# EAGLE board XuLA-SEP_array (EAGLE 5.10), part 1 of 6
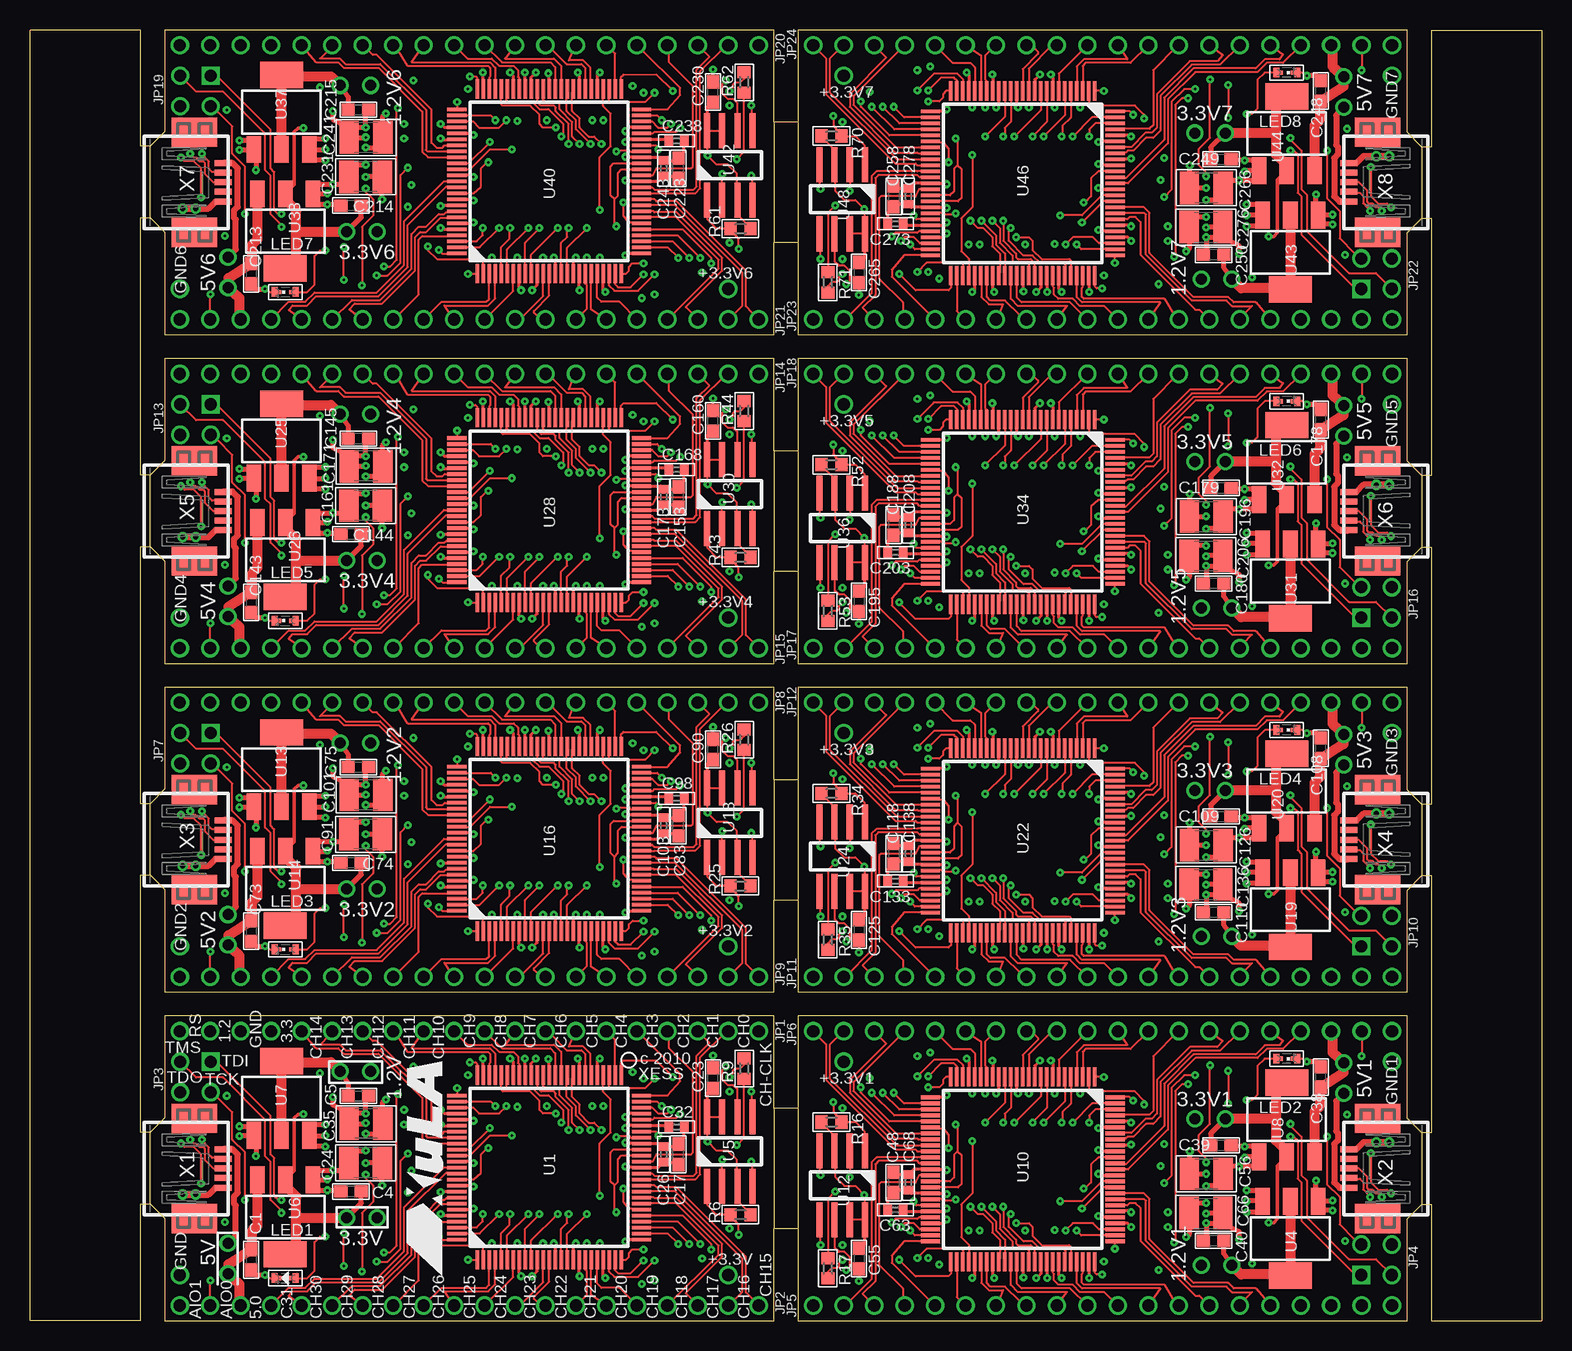
[diagram p0: board, top side]
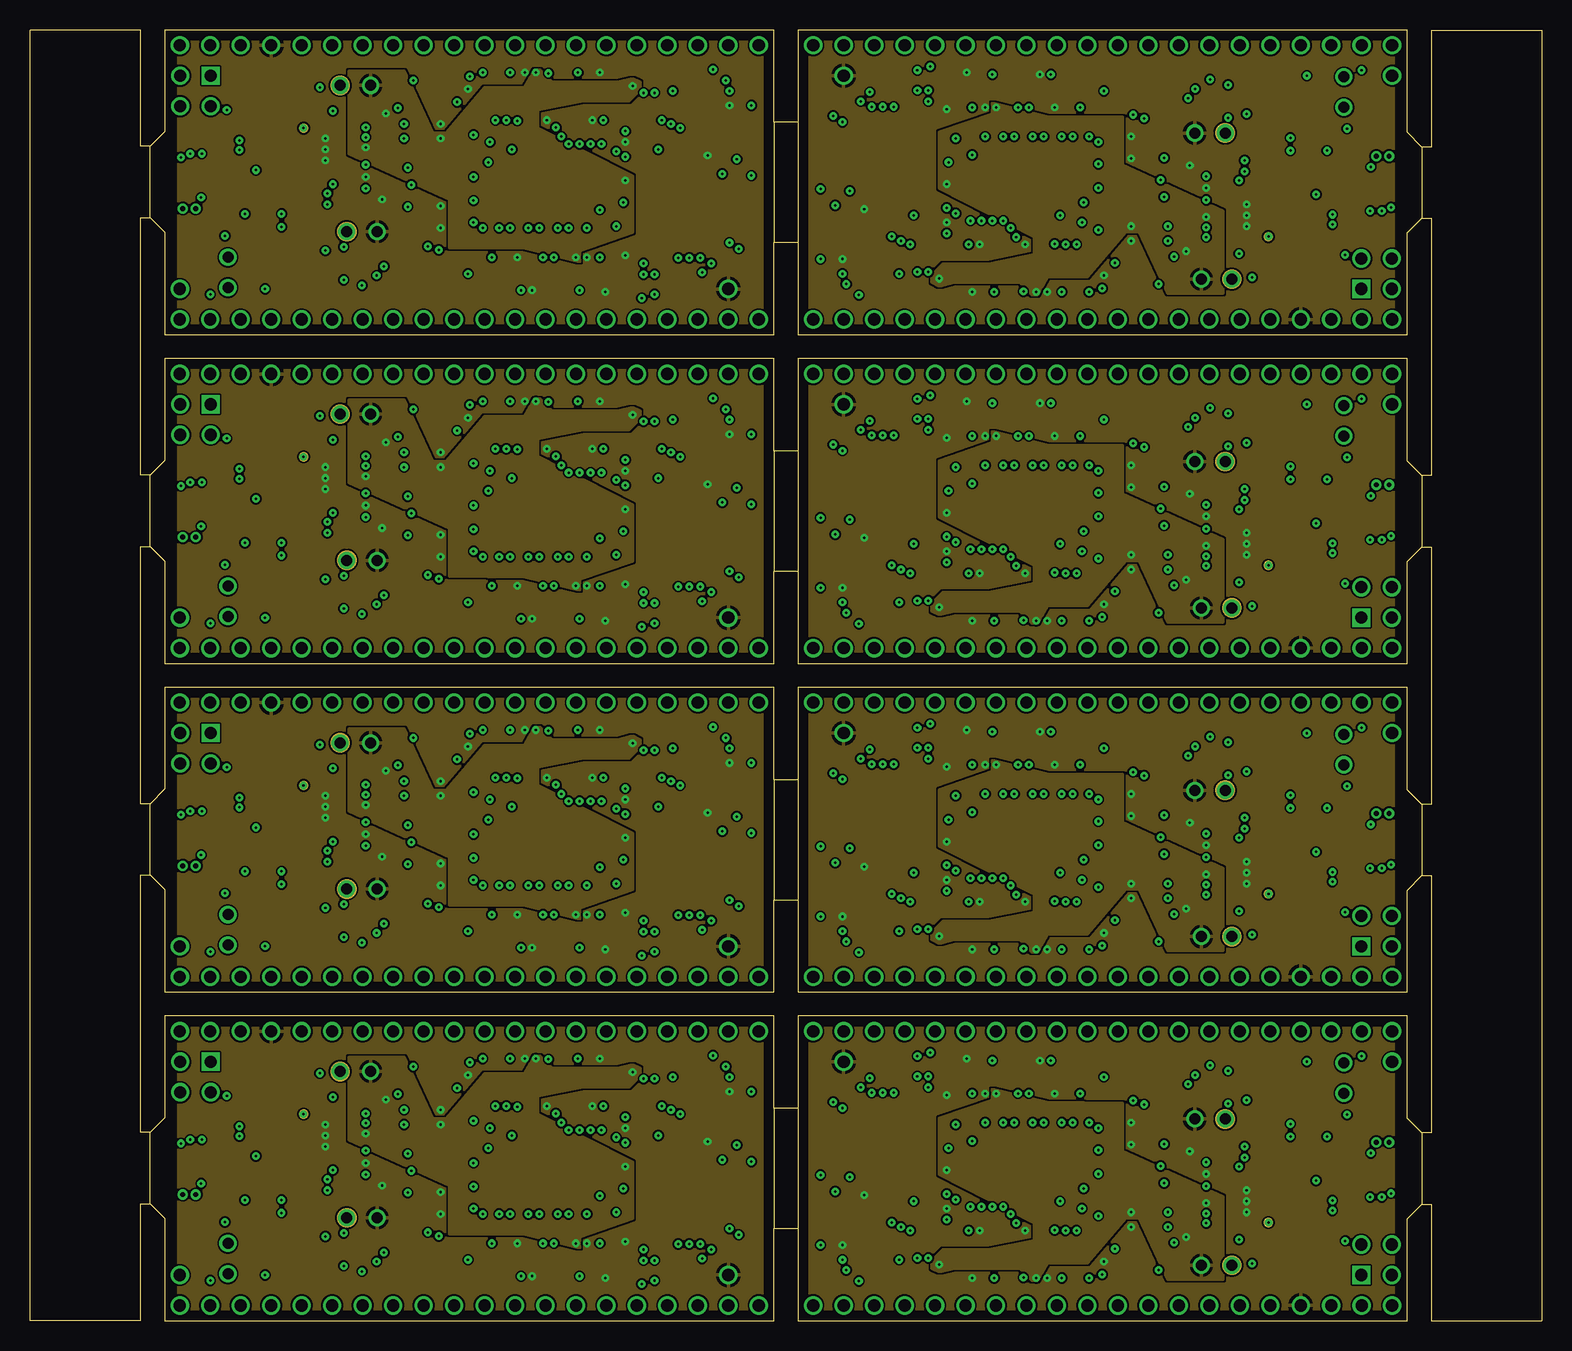
[diagram p1: board, inner layer Route3]
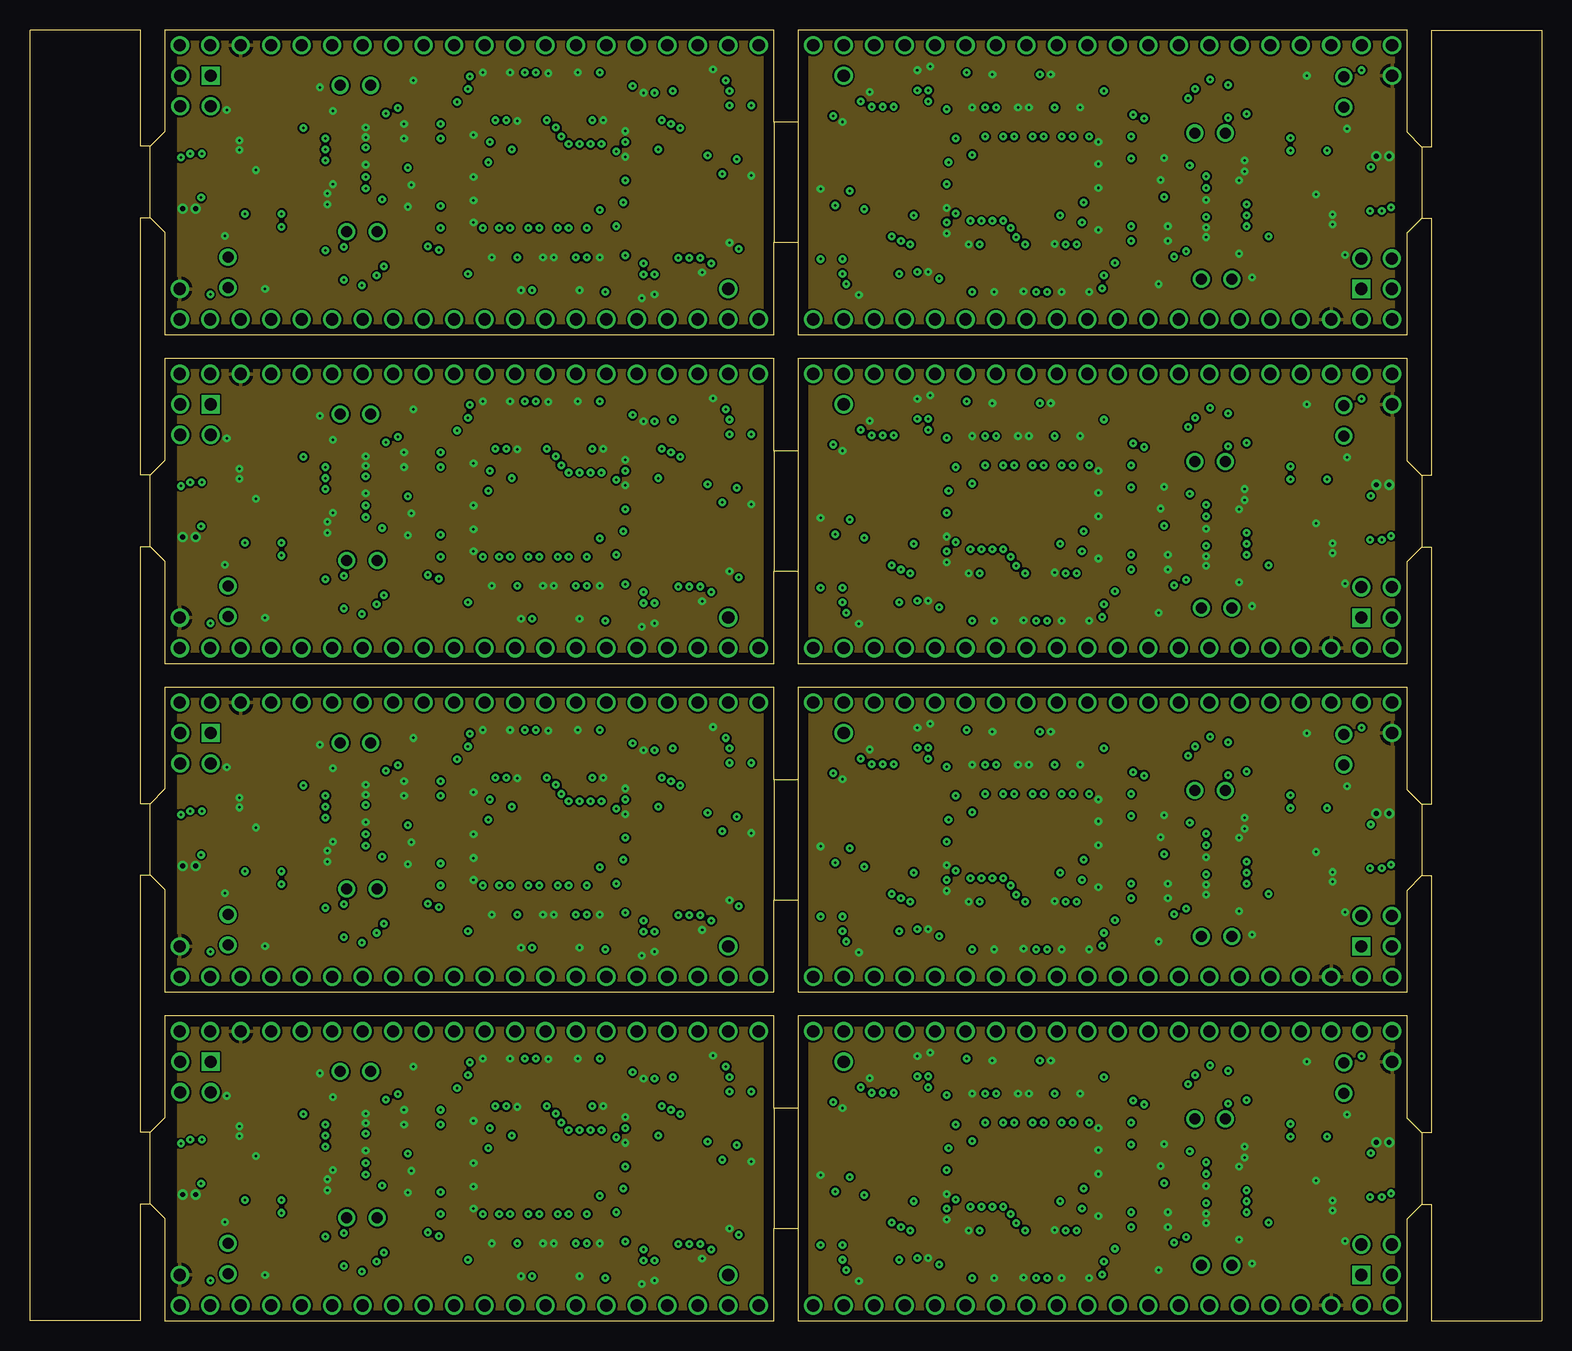
[diagram p2: board, inner layer Route4]
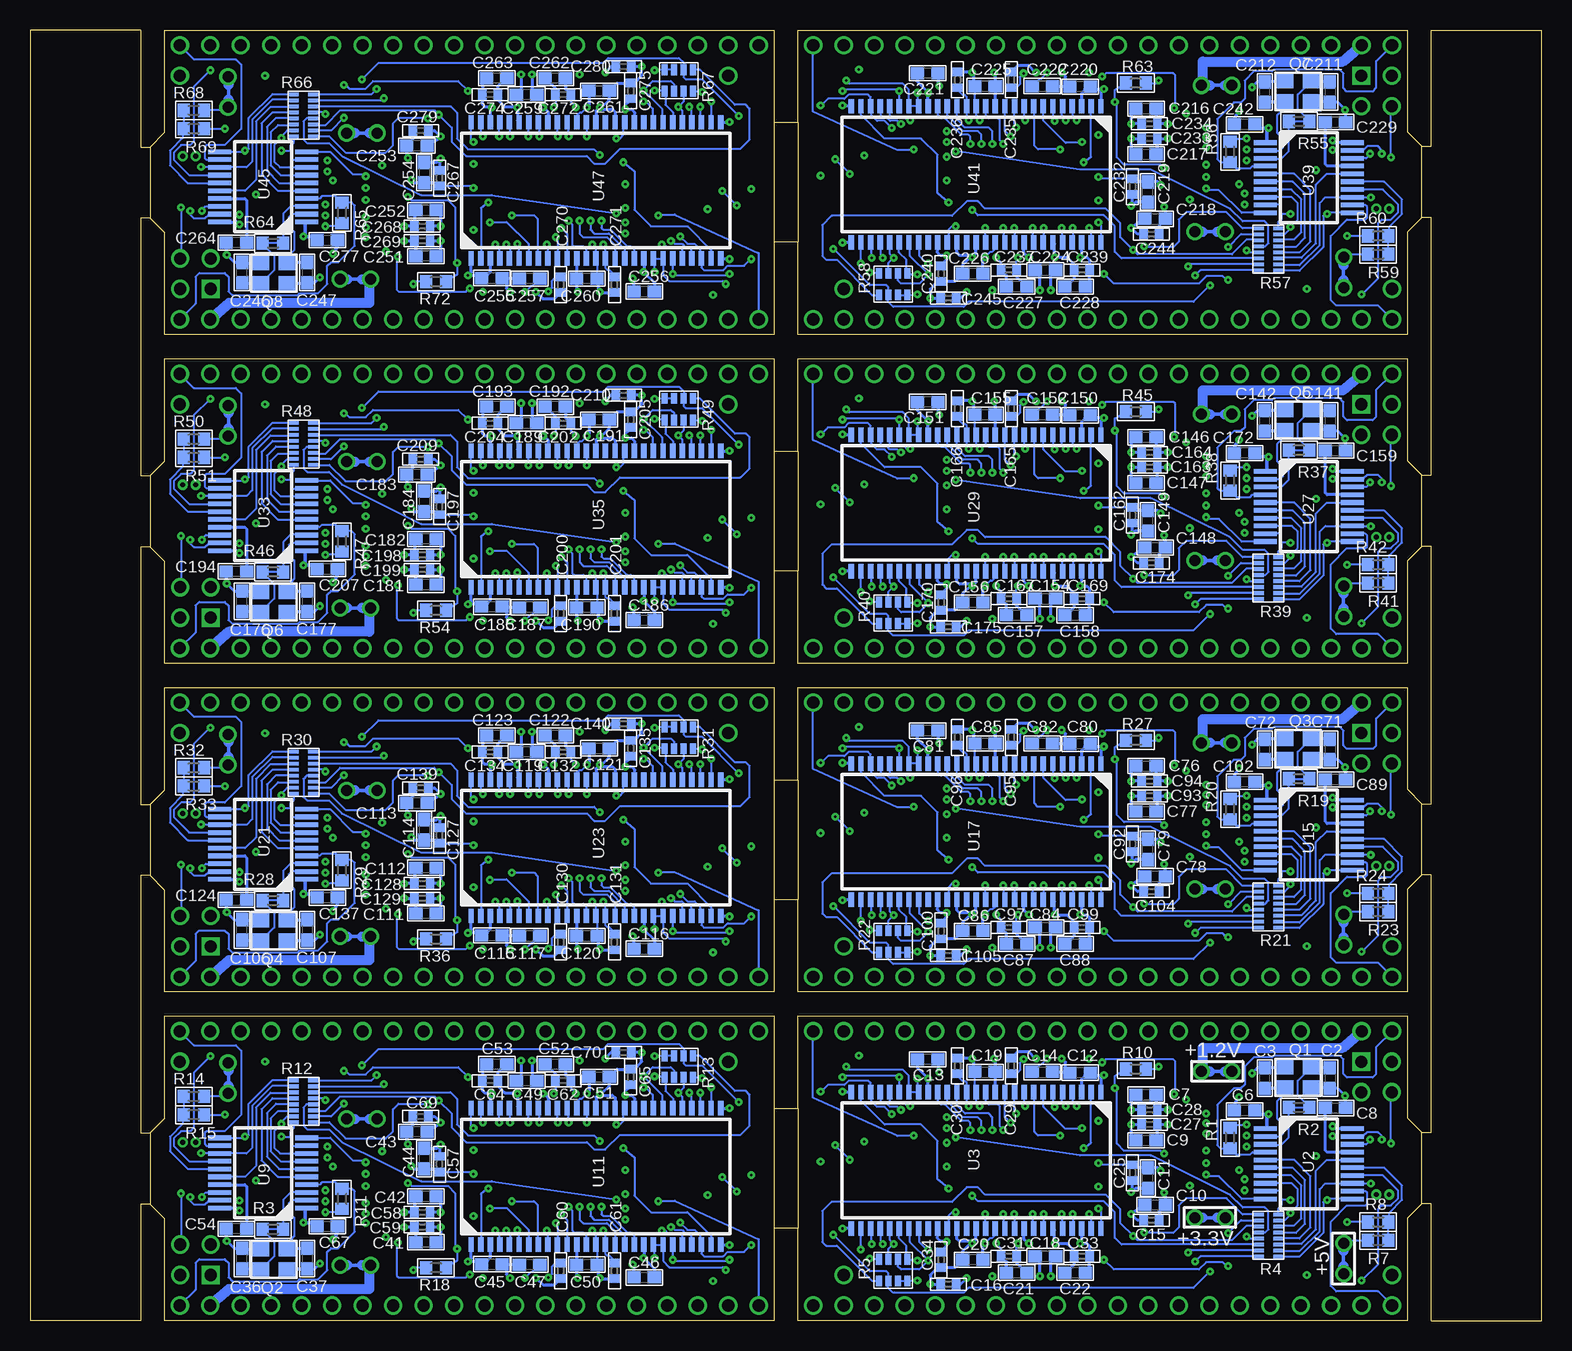
[diagram p3: board, bottom side, seen from below]

Size 126.04 x 107.6 mm. Coordinates in mm from the lower left corner, seen from the top.
Outline: 124 segments
Copper layers (1+3*4+16): Top 0.035mm / dielectric 0.3048mm / Route3 0.07mm / dielectric 0.3048mm / Route4 0.07mm / dielectric 0.3048mm / Bottom 0.035mm
Design rules "logic_popper": minimum track width 6mil, minimum drill 8mil, track to track 6mil, track to pad 6mil, pad to pad 6mil, via to via 6mil, smd to smd 6mil, copper to edge 20mil, drill to drill 8mil, minimum pad ring 10mil, minimum via ring 8.5mil, stop-mask expansion 4mil, vias tented up to drill 20mil, thermal gap 10mil
Net classes: 1 power: clearance 0.254 mm

## Footprints (pad centres in the part's own frame; a part is rotated, then mirrored left to right if it is on the bottom)
JP1-NOSILK = drill 0.914 round: 1 0,-1.27; 2 0,1.27
TP-MINI = drill 1.016 round: 1 0,0
C0603 = smd 1.1 x 1: 1 -0.85,0; 2 0.85,0
C0402 = smd 0.7 x 0.9: 1 -0.65,0; 2 0.65,0
C1210 = smd 1.6 x 2.7: 1 -1.4,0; 2 1.4,0
1X20-NOSILK = drill 1.016 round: 1 -24.13,0; 2 -21.59,0; 3 -19.05,0; 4 -16.51,0; 5 -13.97,0; 6 -11.43,0; 7 -8.89,0; 8 -6.35,0; 9 -3.81,0; 10 -1.27,0; 11 1.27,0; 12 3.81,0; 13 6.35,0; 14 8.89,0; 15 11.43,0; 16 13.97,0; 17 16.51,0; 18 19.05,0; 19 21.59,0; 20 24.13,0
2X02-NOSILK = drill 1.016 square: 1 -1.27,-1.27 | drill 1.016 round: 2 -1.27,1.27; 3 1.27,-1.27; 4 1.27,1.27
CHIPLED-0603-TTW = smd 0.8 x 0.5: A 0,-0.875; C 0,0.875 | smd 0.35 x 0.35: A@1 0,-0.5; C@1 0,0.5
32X25 = smd 1.2 x 1.4: 1 0,0; 2 0,-2.2; 3 1.7,-2.2; 4 1.7,0
R0603 = smd 1 x 1.1: 1 -0.85,0; 2 0.85,0
741X163 = smd 0.3 x 0.8: 1 -1.75,-0.8; 2 -1.25,-0.8; 3 -0.75,-0.8; 4 -0.25,-0.8; 5 0.25,-0.8; 6 0.75,-0.8; 7 1.25,-0.8; 8 1.75,-0.8; 9 1.75,0.8; 10 1.25,0.8; 11 0.75,0.8; 12 0.25,0.8; 13 -0.25,0.8; 14 -0.75,0.8; 15 -1.25,0.8; 16 -1.75,0.8
742C083 = smd 0.5 x 0.9: 1 -0.4,-0.9; 2 0.4,-0.9; 3 1.2,-0.9; 4 2,-0.9; 5 2,0.9; 6 1.2,0.9; 7 0.4,0.9; 8 -0.4,0.9
XILINX-VQ100 = smd 1.6 x 0.3: 1 0,0; 2 0,-0.5; 3 0,-1; 4 0,-1.5; 5 0,-2; 6 0,-2.5; 7 0,-3; 8 0,-3.5; 9 0,-4; 10 0,-4.5; 11 0,-5; 12 0,-5.5; 13 0,-6; 14 0,-6.5; 15 0,-7; 16 0,-7.5; 17 0,-8; 18 0,-8.5; 19 0,-9; 20 0,-9.5; 21 0,-10; 22 0,-10.5; 23 0,-11; 24 0,-11.5; 25 0,-12; 51 15.4,-12; 52 15.4,-11.5; 53 15.4,-11; 54 15.4,-10.5; 55 15.4,-10; 56 15.4,-9.5; 57 15.4,-9; 58 15.4,-8.5; 59 15.4,-8; 60 15.4,-7.5; 61 15.4,-7; 62 15.4,-6.5; 63 15.4,-6; 64 15.4,-5.5; 65 15.4,-5; 66 15.4,-4.5; 67 15.4,-4; 68 15.4,-3.5; 69 15.4,-3; 70 15.4,-2.5; 71 15.4,-2; 72 15.4,-1.5; 73 15.4,-1; 74 15.4,-0.5; 75 15.4,0 | smd 0.3 x 1.6: 26 1.7,-13.7; 27 2.2,-13.7; 28 2.7,-13.7; 29 3.2,-13.7; 30 3.7,-13.7; 31 4.2,-13.7; 32 4.7,-13.7; 33 5.2,-13.7; 34 5.7,-13.7; 35 6.2,-13.7; 36 6.7,-13.7; 37 7.2,-13.7; 38 7.7,-13.7; 39 8.2,-13.7; 40 8.7,-13.7; 41 9.2,-13.7; 42 9.7,-13.7; 43 10.2,-13.7; 44 10.7,-13.7; 45 11.2,-13.7; 46 11.7,-13.7; 47 12.2,-13.7; 48 12.7,-13.7; 49 13.2,-13.7; 50 13.7,-13.7; 76 13.7,1.7; 77 13.2,1.7; 78 12.7,1.7; 79 12.2,1.7; 80 11.7,1.7; 81 11.2,1.7; 82 10.7,1.7; 83 10.2,1.7; 84 9.7,1.7; 85 9.2,1.7; 86 8.7,1.7; 87 8.2,1.7; 88 7.7,1.7; 89 7.2,1.7; 90 6.7,1.7; 91 6.2,1.7; 92 5.7,1.7; 93 5.2,1.7; 94 4.7,1.7; 95 4.2,1.7; 96 3.7,1.7; 97 3.2,1.7; 98 2.7,1.7; 99 2.2,1.7; 100 1.7,1.7
MICROCHIP-20_SSOP = smd 1.89 x 0.38: 1 0,0; 2 0,-0.65; 3 0,-1.3; 4 0,-1.95; 5 0,-2.6; 6 0,-3.25; 7 0,-3.9; 8 0,-4.55; 9 0,-5.2; 10 0,-5.85; 11 7.25,-5.85; 12 7.25,-5.2; 13 7.25,-4.55; 14 7.25,-3.9; 15 7.25,-3.25; 16 7.25,-2.6; 17 7.25,-1.95; 18 7.25,-1.3; 19 7.25,-0.65; 20 7.25,0
TSOPII-54 = smd 1.2 x 0.45: 1 0,0; 2 0,-0.8; 3 0,-1.6; 4 0,-2.4; 5 0,-3.2; 6 0,-4; 7 0,-4.8; 8 0,-5.6; 9 0,-6.4; 10 0,-7.2; 11 0,-8; 12 0,-8.8; 13 0,-9.6; 14 0,-10.4; 15 0,-11.2; 16 0,-12; 17 0,-12.8; 18 0,-13.6; 19 0,-14.4; 20 0,-15.2; 21 0,-16; 22 0,-16.8; 23 0,-17.6; 24 0,-18.4; 25 0,-19.2; 26 0,-20; 27 0,-20.8; 28 11.36,-20.8; 29 11.36,-20; 30 11.36,-19.2; 31 11.36,-18.4; 32 11.36,-17.6; 33 11.36,-16.8; 34 11.36,-16; 35 11.36,-15.2; 36 11.36,-14.4; 37 11.36,-13.6; 38 11.36,-12.8; 39 11.36,-12; 40 11.36,-11.2; 41 11.36,-10.4; 42 11.36,-9.6; 43 11.36,-8.8; 44 11.36,-8; 45 11.36,-7.2; 46 11.36,-6.4; 47 11.36,-5.6; 48 11.36,-4.8; 49 11.36,-4; 50 11.36,-3.2; 51 11.36,-2.4; 52 11.36,-1.6; 53 11.36,-0.8; 54 11.36,0
SOT223 = smd 1.219 x 2.235: 1 -2.311,-3.099; 2 0,-3.099; 3 2.311,-3.099 | smd 3.6 x 2.2: 4 0,3.099
WINBOND-8_SOIC_150_208 = smd 2.921 x 0.51: 1 1.06,0; 2 1.06,-1.27; 3 1.06,-2.54; 4 1.06,-3.81; 5 6.839,-3.81; 6 6.839,-2.54; 7 6.839,-1.27; 8 6.839,0
UX60SC-MB-5ST = smd 1.4 x 0.5: 1 6.1,1.6; 2 6.1,0.8; 3 6.1,0; 4 6.1,-0.8; 5 6.1,-1.6 | smd 3.8 x 2.449: M1 3.7,-4.175; M2 3.7,4.175

## Placement (x,y rotation side)
1.2V  [JP1-NOSILK]  27.12,20.78 270 top
1.2V1  [JP1-NOSILK]  98.92,4.62 90 top
1.2V2  [JP1-NOSILK]  27.12,48.18 270 top
1.2V3  [JP1-NOSILK]  98.92,32.02 90 top
1.2V4  [JP1-NOSILK]  27.12,75.58 270 top
1.2V5  [JP1-NOSILK]  98.92,59.42 90 top
1.2V6  [JP1-NOSILK]  27.12,102.98 270 top
1.2V7  [JP1-NOSILK]  98.92,86.82 90 top
3.3V  [JP1-NOSILK]  27.68,8.59 270 top
3.3V1  [JP1-NOSILK]  98.36,16.81 90 top
3.3V2  [JP1-NOSILK]  27.68,35.99 270 top
3.3V3  [JP1-NOSILK]  98.36,44.21 90 top
3.3V4  [JP1-NOSILK]  27.68,63.39 270 top
3.3V5  [JP1-NOSILK]  98.36,71.61 90 top
3.3V6  [JP1-NOSILK]  27.68,90.79 270 top
3.3V7  [JP1-NOSILK]  98.36,99.01 90 top
5V  [JP1-NOSILK]  16.5,5.18 180 top
5V1  [JP1-NOSILK]  109.54,20.22 0 top
5V2  [JP1-NOSILK]  16.5,32.58 180 top
5V3  [JP1-NOSILK]  109.54,47.62 0 top
5V4  [JP1-NOSILK]  16.5,59.98 180 top
5V5  [JP1-NOSILK]  109.54,75.02 0 top
5V6  [JP1-NOSILK]  16.5,87.38 180 top
5V7  [JP1-NOSILK]  109.54,102.42 0 top
+3.3V  TPTP-MINI  [TP-MINI]  58.21,3.81 0 top
+3.3V1  TPTP-MINI  [TP-MINI]  67.83,21.59 180 top
+3.3V2  TPTP-MINI  [TP-MINI]  58.21,31.21 0 top
+3.3V3  TPTP-MINI  [TP-MINI]  67.83,48.99 180 top
+3.3V4  TPTP-MINI  [TP-MINI]  58.21,58.61 0 top
+3.3V5  TPTP-MINI  [TP-MINI]  67.83,76.39 180 top
+3.3V6  TPTP-MINI  [TP-MINI]  58.21,86.01 0 top
+3.3V7  TPTP-MINI  [TP-MINI]  67.83,103.79 180 top
C1  4.7uF  [C0603]  18.43,5.08 270 top
C2  10pF  [C0603]  17.67,20.22 270 bottom
C3  10pF  [C0603]  23.11,20.22 90 bottom
C4  4.7uF  [C0603]  26.76,10.77 180 top
C5  4.7uF  [C0603]  27.37,18.75 0 top
C6  0.1uF  [C0603]  24.78,17.53 180 bottom
C7  0.1uF  [C0603]  33.01,18.85 0 bottom
C8  0.47uF  [C0603]  17.21,17.73 0 bottom
C9  0.1uF  [C0603]  33.01,15.04 0 bottom
C10  0.1uF  [C0603]  32.25,9.65 0 bottom
C11  0.1uF  [C0603]  32.86,11.89 90 bottom
C12  0.1uF  [C0603]  38.5,20.68 180 bottom
C13  0.1uF  [C0603]  51.2,21.79 180 bottom
C14  0.1uF  [C0603]  41.65,20.73 0 bottom
C15  10nF  [C0402]  32.56,8.38 0 bottom
C16  10nF  [C0402]  49.47,3.05 180 bottom
C17  0.1uF  [C0603]  54.04,13.87 90 top
C18  0.1uF  [C0603]  41.39,5.38 0 bottom
C19  0.1uF  [C0603]  46.42,20.73 0 bottom
C20  0.1uF  [C0603]  47.44,5.08 180 bottom
C21  0.1uF  [C0603]  43.78,4.01 0 bottom
C22  0.1uF  [C0603]  38.91,4.01 0 bottom
C23  0.1uF  [C0603]  56.94,20.22 90 top
C24  22uF  [C1210]  27.98,13.16 180 top
C25  10nF  [C0402]  34.13,12.34 90 bottom
C26  10nF  [C0402]  52.82,13.87 90 top
C27  10nF  [C0402]  32.71,16.36 0 bottom
C28  10nF  [C0402]  32.71,17.58 0 bottom
C29  10nF  [C0402]  44.24,21.23 270 bottom
C30  10nF  [C0402]  48.71,21.23 270 bottom
C31  10nF  [C0402]  44.44,5.38 0 bottom
C32  10nF  [C0402]  53.89,16.15 0 top
C33  10nF  [C0402]  38.35,5.38 0 bottom
C34  10nF  [C0402]  50.08,5.08 270 bottom
C35  22uF  [C1210]  28.01,16.43 180 top
C36  10pF  [C0603]  108.37,5.18 90 bottom
C37  10pF  [C0603]  102.93,5.18 270 bottom
C38  4.7uF  [C0603]  107.61,20.32 90 top
C39  4.7uF  [C0603]  99.27,14.63 0 top
C40  4.7uF  [C0603]  98.66,6.65 180 top
C41  0.1uF  [C0603]  93.03,6.55 180 bottom
C42  0.1uF  [C0603]  93.03,10.36 180 bottom
C43  0.1uF  [C0603]  93.79,15.75 180 bottom
C44  0.1uF  [C0603]  93.18,13.51 270 bottom
C45  0.1uF  [C0603]  87.54,4.72 0 bottom
C46  0.1uF  [C0603]  74.84,3.61 0 bottom
C47  0.1uF  [C0603]  84.39,4.67 180 bottom
C48  0.1uF  [C0603]  71.99,11.53 270 top
C49  0.1uF  [C0603]  84.64,20.02 180 bottom
C50  0.1uF  [C0603]  79.61,4.67 180 bottom
C51  0.1uF  [C0603]  78.6,20.32 0 bottom
C52  0.1uF  [C0603]  82.26,21.39 180 bottom
C53  0.1uF  [C0603]  87.13,21.39 180 bottom
C54  0.47uF  [C0603]  108.82,7.67 180 bottom
C55  0.1uF  [C0603]  69.1,5.18 270 top
C56  22uF  [C1210]  98.06,12.24 0 top
C57  10nF  [C0402]  91.91,13.06 270 bottom
C58  10nF  [C0402]  93.33,9.04 180 bottom
C59  10nF  [C0402]  93.33,7.82 180 bottom
C60  10nF  [C0402]  81.8,4.17 90 bottom
C61  10nF  [C0402]  77.33,4.17 90 bottom
C62  10nF  [C0402]  81.6,20.02 180 bottom
C63  10nF  [C0402]  72.15,9.25 180 top
C64  10nF  [C0402]  87.69,20.02 180 bottom
C65  10nF  [C0402]  75.96,20.32 90 bottom
C66  22uF  [C1210]  98.03,8.97 0 top
C67  0.1uF  [C0603]  101.26,7.87 0 bottom
C68  10nF  [C0402]  73.21,11.53 270 top
C69  10nF  [C0402]  93.48,17.02 180 bottom
C70  10nF  [C0402]  76.57,22.35 0 bottom
C71  10pF  [C0603]  17.67,47.62 270 bottom
C72  10pF  [C0603]  23.11,47.62 90 bottom
C73  4.7uF  [C0603]  18.43,32.48 270 top
C74  4.7uF  [C0603]  26.76,38.17 180 top
C75  4.7uF  [C0603]  27.37,46.15 0 top
C76  0.1uF  [C0603]  33.01,46.25 0 bottom
C77  0.1uF  [C0603]  33.01,42.44 0 bottom
C78  0.1uF  [C0603]  32.25,37.05 0 bottom
C79  0.1uF  [C0603]  32.86,39.29 90 bottom
C80  0.1uF  [C0603]  38.5,48.08 180 bottom
C81  0.1uF  [C0603]  51.2,49.19 180 bottom
C82  0.1uF  [C0603]  41.65,48.13 0 bottom
C83  0.1uF  [C0603]  54.04,41.27 90 top
C84  0.1uF  [C0603]  41.39,32.78 0 bottom
C85  0.1uF  [C0603]  46.42,48.13 0 bottom
C86  0.1uF  [C0603]  47.44,32.48 180 bottom
C87  0.1uF  [C0603]  43.78,31.41 0 bottom
C88  0.1uF  [C0603]  38.91,31.41 0 bottom
C89  0.47uF  [C0603]  17.21,45.13 0 bottom
C90  0.1uF  [C0603]  56.94,47.62 90 top
C91  22uF  [C1210]  27.98,40.56 180 top
C92  10nF  [C0402]  34.13,39.74 90 bottom
C93  10nF  [C0402]  32.71,43.76 0 bottom
C94  10nF  [C0402]  32.71,44.98 0 bottom
C95  10nF  [C0402]  44.24,48.63 270 bottom
C96  10nF  [C0402]  48.71,48.63 270 bottom
C97  10nF  [C0402]  44.44,32.78 0 bottom
C98  10nF  [C0402]  53.89,43.55 0 top
C99  10nF  [C0402]  38.35,32.78 0 bottom
C100  10nF  [C0402]  50.08,32.48 270 bottom
C101  22uF  [C1210]  28.01,43.83 180 top
C102  0.1uF  [C0603]  24.78,44.93 180 bottom
C103  10nF  [C0402]  52.82,41.27 90 top
C104  10nF  [C0402]  32.56,35.78 0 bottom
C105  10nF  [C0402]  49.47,30.45 180 bottom
C106  10pF  [C0603]  108.37,32.58 90 bottom
C107  10pF  [C0603]  102.93,32.58 270 bottom
C108  4.7uF  [C0603]  107.61,47.72 90 top
C109  4.7uF  [C0603]  99.27,42.03 0 top
C110  4.7uF  [C0603]  98.66,34.05 180 top
C111  0.1uF  [C0603]  93.03,33.95 180 bottom
C112  0.1uF  [C0603]  93.03,37.76 180 bottom
C113  0.1uF  [C0603]  93.79,43.15 180 bottom
C114  0.1uF  [C0603]  93.18,40.91 270 bottom
C115  0.1uF  [C0603]  87.54,32.12 0 bottom
C116  0.1uF  [C0603]  74.84,31.01 0 bottom
C117  0.1uF  [C0603]  84.39,32.07 180 bottom
C118  0.1uF  [C0603]  71.99,38.93 270 top
C119  0.1uF  [C0603]  84.64,47.42 180 bottom
C120  0.1uF  [C0603]  79.61,32.07 180 bottom
C121  0.1uF  [C0603]  78.6,47.72 0 bottom
C122  0.1uF  [C0603]  82.26,48.79 180 bottom
C123  0.1uF  [C0603]  87.13,48.79 180 bottom
C124  0.47uF  [C0603]  108.82,35.07 180 bottom
C125  0.1uF  [C0603]  69.1,32.58 270 top
C126  22uF  [C1210]  98.06,39.64 0 top
C127  10nF  [C0402]  91.91,40.46 270 bottom
C128  10nF  [C0402]  93.33,36.44 180 bottom
C129  10nF  [C0402]  93.33,35.22 180 bottom
C130  10nF  [C0402]  81.8,31.57 90 bottom
C131  10nF  [C0402]  77.33,31.57 90 bottom
C132  10nF  [C0402]  81.6,47.42 180 bottom
C133  10nF  [C0402]  72.15,36.65 180 top
C134  10nF  [C0402]  87.69,47.42 180 bottom
C135  10nF  [C0402]  75.96,47.72 90 bottom
C136  22uF  [C1210]  98.03,36.37 0 top
C137  0.1uF  [C0603]  101.26,35.27 0 bottom
C138  10nF  [C0402]  73.21,38.93 270 top
C139  10nF  [C0402]  93.48,44.42 180 bottom
C140  10nF  [C0402]  76.57,49.75 0 bottom
C141  10pF  [C0603]  17.67,75.02 270 bottom
C142  10pF  [C0603]  23.11,75.02 90 bottom
C143  4.7uF  [C0603]  18.43,59.88 270 top
C144  4.7uF  [C0603]  26.76,65.57 180 top
C145  4.7uF  [C0603]  27.37,73.55 0 top
C146  0.1uF  [C0603]  33.01,73.65 0 bottom
C147  0.1uF  [C0603]  33.01,69.84 0 bottom
C148  0.1uF  [C0603]  32.25,64.45 0 bottom
C149  0.1uF  [C0603]  32.86,66.69 90 bottom
C150  0.1uF  [C0603]  38.5,75.48 180 bottom
C151  0.1uF  [C0603]  51.2,76.59 180 bottom
C152  0.1uF  [C0603]  41.65,75.53 0 bottom
C153  0.1uF  [C0603]  54.04,68.67 90 top
C154  0.1uF  [C0603]  41.39,60.18 0 bottom
C155  0.1uF  [C0603]  46.42,75.53 0 bottom
C156  0.1uF  [C0603]  47.44,59.88 180 bottom
C157  0.1uF  [C0603]  43.78,58.81 0 bottom
C158  0.1uF  [C0603]  38.91,58.81 0 bottom
C159  0.47uF  [C0603]  17.21,72.53 0 bottom
C160  0.1uF  [C0603]  56.94,75.02 90 top
C161  22uF  [C1210]  27.98,67.96 180 top
C162  10nF  [C0402]  34.13,67.14 90 bottom
C163  10nF  [C0402]  32.71,71.16 0 bottom
C164  10nF  [C0402]  32.71,72.38 0 bottom
C165  10nF  [C0402]  44.24,76.03 270 bottom
C166  10nF  [C0402]  48.71,76.03 270 bottom
C167  10nF  [C0402]  44.44,60.18 0 bottom
C168  10nF  [C0402]  53.89,70.95 0 top
C169  10nF  [C0402]  38.35,60.18 0 bottom
C170  10nF  [C0402]  50.08,59.88 270 bottom
C171  22uF  [C1210]  28.01,71.23 180 top
C172  0.1uF  [C0603]  24.78,72.33 180 bottom
C173  10nF  [C0402]  52.82,68.67 90 top
C174  10nF  [C0402]  32.56,63.18 0 bottom
C175  10nF  [C0402]  49.47,57.85 180 bottom
C176  10pF  [C0603]  108.37,59.98 90 bottom
C177  10pF  [C0603]  102.93,59.98 270 bottom
C178  4.7uF  [C0603]  107.61,75.12 90 top
C179  4.7uF  [C0603]  99.27,69.43 0 top
C180  4.7uF  [C0603]  98.66,61.45 180 top
C181  0.1uF  [C0603]  93.03,61.35 180 bottom
C182  0.1uF  [C0603]  93.03,65.16 180 bottom
C183  0.1uF  [C0603]  93.79,70.55 180 bottom
C184  0.1uF  [C0603]  93.18,68.31 270 bottom
C185  0.1uF  [C0603]  87.54,59.52 0 bottom
C186  0.1uF  [C0603]  74.84,58.41 0 bottom
C187  0.1uF  [C0603]  84.39,59.47 180 bottom
C188  0.1uF  [C0603]  71.99,66.33 270 top
C189  0.1uF  [C0603]  84.64,74.82 180 bottom
C190  0.1uF  [C0603]  79.61,59.47 180 bottom
C191  0.1uF  [C0603]  78.6,75.12 0 bottom
C192  0.1uF  [C0603]  82.26,76.19 180 bottom
C193  0.1uF  [C0603]  87.13,76.19 180 bottom
C194  0.47uF  [C0603]  108.82,62.47 180 bottom
C195  0.1uF  [C0603]  69.1,59.98 270 top
C196  22uF  [C1210]  98.06,67.04 0 top
C197  10nF  [C0402]  91.91,67.86 270 bottom
C198  10nF  [C0402]  93.33,63.84 180 bottom
C199  10nF  [C0402]  93.33,62.62 180 bottom
C200  10nF  [C0402]  81.8,58.97 90 bottom
C201  10nF  [C0402]  77.33,58.97 90 bottom
C202  10nF  [C0402]  81.6,74.82 180 bottom
C203  10nF  [C0402]  72.15,64.05 180 top
C204  10nF  [C0402]  87.69,74.82 180 bottom
C205  10nF  [C0402]  75.96,75.12 90 bottom
C206  22uF  [C1210]  98.03,63.77 0 top
C207  0.1uF  [C0603]  101.26,62.67 0 bottom
C208  10nF  [C0402]  73.21,66.33 270 top
C209  10nF  [C0402]  93.48,71.82 180 bottom
C210  10nF  [C0402]  76.57,77.15 0 bottom
C211  10pF  [C0603]  17.67,102.42 270 bottom
C212  10pF  [C0603]  23.11,102.42 90 bottom
C213  4.7uF  [C0603]  18.43,87.28 270 top
C214  4.7uF  [C0603]  26.76,92.97 180 top
C215  4.7uF  [C0603]  27.37,100.95 0 top
C216  0.1uF  [C0603]  33.01,101.05 0 bottom
C217  0.1uF  [C0603]  33.01,97.24 0 bottom
C218  0.1uF  [C0603]  32.25,91.85 0 bottom
C219  0.1uF  [C0603]  32.86,94.09 90 bottom
C220  0.1uF  [C0603]  38.5,102.88 180 bottom
C221  0.1uF  [C0603]  51.2,103.99 180 bottom
C222  0.1uF  [C0603]  41.65,102.93 0 bottom
C223  0.1uF  [C0603]  54.04,96.07 90 top
C224  0.1uF  [C0603]  41.39,87.58 0 bottom
C225  0.1uF  [C0603]  46.42,102.93 0 bottom
C226  0.1uF  [C0603]  47.44,87.28 180 bottom
C227  0.1uF  [C0603]  43.78,86.21 0 bottom
C228  0.1uF  [C0603]  38.91,86.21 0 bottom
C229  0.47uF  [C0603]  17.21,99.93 0 bottom
C230  0.1uF  [C0603]  56.94,102.42 90 top
C231  22uF  [C1210]  27.98,95.36 180 top
C232  10nF  [C0402]  34.13,94.54 90 bottom
C233  10nF  [C0402]  32.71,98.56 0 bottom
C234  10nF  [C0402]  32.71,99.78 0 bottom
C235  10nF  [C0402]  44.24,103.43 270 bottom
C236  10nF  [C0402]  48.71,103.43 270 bottom
C237  10nF  [C0402]  44.44,87.58 0 bottom
C238  10nF  [C0402]  53.89,98.35 0 top
C239  10nF  [C0402]  38.35,87.58 0 bottom
C240  10nF  [C0402]  50.08,87.28 270 bottom
C241  22uF  [C1210]  28.01,98.63 180 top
C242  0.1uF  [C0603]  24.78,99.73 180 bottom
C243  10nF  [C0402]  52.82,96.07 90 top
C244  10nF  [C0402]  32.56,90.58 0 bottom
C245  10nF  [C0402]  49.47,85.25 180 bottom
C246  10pF  [C0603]  108.37,87.38 90 bottom
C247  10pF  [C0603]  102.93,87.38 270 bottom
C248  4.7uF  [C0603]  107.61,102.52 90 top
C249  4.7uF  [C0603]  99.27,96.83 0 top
C250  4.7uF  [C0603]  98.66,88.85 180 top
C251  0.1uF  [C0603]  93.03,88.75 180 bottom
C252  0.1uF  [C0603]  93.03,92.56 180 bottom
C253  0.1uF  [C0603]  93.79,97.95 180 bottom
C254  0.1uF  [C0603]  93.18,95.71 270 bottom
C255  0.1uF  [C0603]  87.54,86.92 0 bottom
C256  0.1uF  [C0603]  74.84,85.81 0 bottom
C257  0.1uF  [C0603]  84.39,86.87 180 bottom
C258  0.1uF  [C0603]  71.99,93.73 270 top
C259  0.1uF  [C0603]  84.64,102.22 180 bottom
C260  0.1uF  [C0603]  79.61,86.87 180 bottom
C261  0.1uF  [C0603]  78.6,102.52 0 bottom
C262  0.1uF  [C0603]  82.26,103.59 180 bottom
C263  0.1uF  [C0603]  87.13,103.59 180 bottom
C264  0.47uF  [C0603]  108.82,89.87 180 bottom
C265  0.1uF  [C0603]  69.1,87.38 270 top
C266  22uF  [C1210]  98.06,94.44 0 top
C267  10nF  [C0402]  91.91,95.26 270 bottom
C268  10nF  [C0402]  93.33,91.24 180 bottom
C269  10nF  [C0402]  93.33,90.02 180 bottom
C270  10nF  [C0402]  81.8,86.37 90 bottom
C271  10nF  [C0402]  77.33,86.37 90 bottom
C272  10nF  [C0402]  81.6,102.22 180 bottom
C273  10nF  [C0402]  72.15,91.45 180 top
C274  10nF  [C0402]  87.69,102.22 180 bottom
C275  10nF  [C0402]  75.96,102.52 90 bottom
C276  22uF  [C1210]  98.03,91.17 0 top
C277  0.1uF  [C0603]  101.26,90.07 0 bottom
C278  10nF  [C0402]  73.21,93.73 270 top
C279  10nF  [C0402]  93.48,99.22 180 bottom
C280  10nF  [C0402]  76.57,104.55 0 bottom
GND  TPTP-MINI  [TP-MINI]  12.49,3.81 0 top
GND1  TPTP-MINI  [TP-MINI]  113.55,21.59 180 top
GND2  TPTP-MINI  [TP-MINI]  12.49,31.21 0 top
GND3  TPTP-MINI  [TP-MINI]  113.55,48.99 180 top
GND4  TPTP-MINI  [TP-MINI]  12.49,58.61 0 top
GND5  TPTP-MINI  [TP-MINI]  113.55,76.39 180 top
GND6  TPTP-MINI  [TP-MINI]  12.49,86.01 0 top
GND7  TPTP-MINI  [TP-MINI]  113.55,103.79 180 top
JP1  [1X20-NOSILK]  36.62,24.13 180 top
JP2  [1X20-NOSILK]  36.62,1.27 180 top
JP3  [2X02-NOSILK]  13.78,20.32 180 top
JP4  [2X02-NOSILK]  112.25,5.08 0 top
JP5  [1X20-NOSILK]  89.42,1.27 0 top
JP6  [1X20-NOSILK]  89.42,24.13 0 top
JP7  [2X02-NOSILK]  13.78,47.72 180 top
JP8  [1X20-NOSILK]  36.62,51.53 180 top
JP9  [1X20-NOSILK]  36.62,28.67 180 top
JP10  [2X02-NOSILK]  112.25,32.48 0 top
JP11  [1X20-NOSILK]  89.42,28.67 0 top
JP12  [1X20-NOSILK]  89.42,51.53 0 top
JP13  [2X02-NOSILK]  13.78,75.12 180 top
JP14  [1X20-NOSILK]  36.62,78.93 180 top
JP15  [1X20-NOSILK]  36.62,56.07 180 top
JP16  [2X02-NOSILK]  112.25,59.88 0 top
JP17  [1X20-NOSILK]  89.42,56.07 0 top
JP18  [1X20-NOSILK]  89.42,78.93 0 top
JP19  [2X02-NOSILK]  13.78,102.52 180 top
JP20  [1X20-NOSILK]  36.62,106.33 180 top
JP21  [1X20-NOSILK]  36.62,83.47 180 top
JP22  [2X02-NOSILK]  112.25,87.28 0 top
JP23  [1X20-NOSILK]  89.42,83.47 0 top
JP24  [1X20-NOSILK]  89.42,106.33 0 top
LED1  LED0603  [CHIPLED-0603-TTW]  21.28,3.56 90 top
LED2  LED0603  [CHIPLED-0603-TTW]  104.76,21.84 270 top
LED3  LED0603  [CHIPLED-0603-TTW]  21.28,30.96 90 top
LED4  LED0603  [CHIPLED-0603-TTW]  104.76,49.24 270 top
LED5  LED0603  [CHIPLED-0603-TTW]  21.28,58.36 90 top
LED6  LED0603  [CHIPLED-0603-TTW]  104.76,76.64 270 top
LED7  LED0603  [CHIPLED-0603-TTW]  21.28,85.76 90 top
LED8  LED0603  [CHIPLED-0603-TTW]  104.76,104.04 270 top
Q1  12 MHz  [32X25]  19.25,21.13 270 bottom
Q2  12 MHz  [32X25]  106.79,4.27 90 bottom
Q3  12 MHz  [32X25]  19.25,48.53 270 bottom
Q4  12 MHz  [32X25]  106.79,31.67 90 bottom
Q5  12 MHz  [32X25]  19.25,75.93 270 bottom
Q6  12 MHz  [32X25]  106.79,59.07 90 bottom
Q7  12 MHz  [32X25]  19.25,103.33 270 bottom
Q8  12 MHz  [32X25]  106.79,86.47 90 bottom
R1  4.7K  [R0603]  26,15.24 90 bottom
R2  0  [R0603]  20.26,17.78 0 bottom
R3  0  [R0603]  105.78,7.62 180 bottom
R4  110  [741X163]  22.8,7.11 90 bottom
R5  1.0K  [742C083]  53.28,4.22 180 bottom
R6  47K  [R0603]  59.23,8.84 180 top
R7  330K  [R0603]  13.66,6.71 180 bottom
R8  680K  [R0603]  13.66,8.23 180 bottom
R9  110  [R0603]  59.53,21.03 90 top
R10  1.0K  [R0603]  33.85,20.98 0 bottom
R11  4.7K  [R0603]  100.04,10.16 270 bottom
R12  110  [741X163]  103.24,18.29 270 bottom
R13  1.0K  [742C083]  72.76,21.18 0 bottom
R14  330K  [R0603]  112.38,18.69 0 bottom
R15  680K  [R0603]  112.38,17.17 0 bottom
R16  47K  [R0603]  66.81,16.56 0 top
R17  110  [R0603]  66.51,4.37 270 top
R18  1.0K  [R0603]  92.19,4.42 180 bottom
R19  0  [R0603]  20.26,45.18 0 bottom
R20  4.7K  [R0603]  26,42.64 90 bottom
R21  110  [741X163]  22.8,34.51 90 bottom
R22  1.0K  [742C083]  53.28,31.62 180 bottom
R23  330K  [R0603]  13.66,34.11 180 bottom
R24  680K  [R0603]  13.66,35.63 180 bottom
R25  47K  [R0603]  59.23,36.24 180 top
R26  110  [R0603]  59.53,48.43 90 top
R27  1.0K  [R0603]  33.85,48.38 0 bottom
R28  0  [R0603]  105.78,35.02 180 bottom
R29  4.7K  [R0603]  100.04,37.56 270 bottom
R30  110  [741X163]  103.24,45.69 270 bottom
R31  1.0K  [742C083]  72.76,48.58 0 bottom
R32  330K  [R0603]  112.38,46.09 0 bottom
R33  680K  [R0603]  112.38,44.57 0 bottom
R34  47K  [R0603]  66.81,43.96 0 top
R35  110  [R0603]  66.51,31.77 270 top
R36  1.0K  [R0603]  92.19,31.82 180 bottom
R37  0  [R0603]  20.26,72.58 0 bottom
R38  4.7K  [R0603]  26,70.04 90 bottom
R39  110  [741X163]  22.8,61.91 90 bottom
R40  1.0K  [742C083]  53.28,59.02 180 bottom
R41  330K  [R0603]  13.66,61.51 180 bottom
R42  680K  [R0603]  13.66,63.03 180 bottom
R43  47K  [R0603]  59.23,63.64 180 top
R44  110  [R0603]  59.53,75.83 90 top
R45  1.0K  [R0603]  33.85,75.78 0 bottom
R46  0  [R0603]  105.78,62.42 180 bottom
R47  4.7K  [R0603]  100.04,64.96 270 bottom
R48  110  [741X163]  103.24,73.09 270 bottom
R49  1.0K  [742C083]  72.76,75.98 0 bottom
R50  330K  [R0603]  112.38,73.49 0 bottom
R51  680K  [R0603]  112.38,71.97 0 bottom
R52  47K  [R0603]  66.81,71.36 0 top
R53  110  [R0603]  66.51,59.17 270 top
R54  1.0K  [R0603]  92.19,59.22 180 bottom
R55  0  [R0603]  20.26,99.98 0 bottom
R56  4.7K  [R0603]  26,97.44 90 bottom
R57  110  [741X163]  22.8,89.31 90 bottom
R58  1.0K  [742C083]  53.28,86.42 180 bottom
R59  330K  [R0603]  13.66,88.91 180 bottom
R60  680K  [R0603]  13.66,90.43 180 bottom
R61  47K  [R0603]  59.23,91.04 180 top
R62  110  [R0603]  59.53,103.23 90 top
R63  1.0K  [R0603]  33.85,103.18 0 bottom
R64  0  [R0603]  105.78,89.82 180 bottom
R65  4.7K  [R0603]  100.04,92.36 270 bottom
R66  110  [741X163]  103.24,100.49 270 bottom
R67  1.0K  [742C083]  72.76,103.38 0 bottom
R68  330K  [R0603]  112.38,100.89 0 bottom
R69  680K  [R0603]  112.38,99.37 0 bottom
R70  47K  [R0603]  66.81,98.76 0 top
R71  110  [R0603]  66.51,86.57 270 top
R72  1.0K  [R0603]  92.19,86.62 180 bottom
U1  Spartan-3A FPGA  [XILINX-VQ100]  37.28,5.08 90 top
U2  PIC 18F14K50 uC  [MICROCHIP-20_SSOP]  23.06,16 0 bottom
U3  8Mx16 SDRAM  [TSOPII-54]  36.77,19.05 270 bottom
U4  +1.2V Reg.  [SOT223]  105.07,6.86 180 top
U5  W25X20BV-SNIG/SSIG  [WINBOND-8_SOIC_150_208]  56.43,10.16 90 top
U6  +3.3V Reg.  [SOT223]  21.28,8.64 180 top
U7  +1.2V Reg.  [SOT223]  20.97,18.54 0 top
U8  +3.3V Reg.  [SOT223]  104.76,16.76 0 top
U9  PIC 18F14K50 uC  [MICROCHIP-20_SSOP]  102.98,9.4 180 bottom
U10  Spartan-3A FPGA  [XILINX-VQ100]  88.76,20.32 270 top
U11  8Mx16 SDRAM  [TSOPII-54]  89.27,6.35 90 bottom
U12  W25X20BV-SNIG/SSIG  [WINBOND-8_SOIC_150_208]  69.61,15.24 270 top
U13  +1.2V Reg.  [SOT223]  20.97,45.94 0 top
U14  +3.3V Reg.  [SOT223]  21.28,36.04 180 top
U15  PIC 18F14K50 uC  [MICROCHIP-20_SSOP]  23.06,43.4 0 bottom
U16  Spartan-3A FPGA  [XILINX-VQ100]  37.28,32.48 90 top
U17  8Mx16 SDRAM  [TSOPII-54]  36.77,46.45 270 bottom
U18  W25X20BV-SNIG/SSIG  [WINBOND-8_SOIC_150_208]  56.43,37.56 90 top
U19  +1.2V Reg.  [SOT223]  105.07,34.26 180 top
U20  +3.3V Reg.  [SOT223]  104.76,44.16 0 top
U21  PIC 18F14K50 uC  [MICROCHIP-20_SSOP]  102.98,36.8 180 bottom
U22  Spartan-3A FPGA  [XILINX-VQ100]  88.76,47.72 270 top
U23  8Mx16 SDRAM  [TSOPII-54]  89.27,33.75 90 bottom
U24  W25X20BV-SNIG/SSIG  [WINBOND-8_SOIC_150_208]  69.61,42.64 270 top
U25  +1.2V Reg.  [SOT223]  20.97,73.34 0 top
U26  +3.3V Reg.  [SOT223]  21.28,63.44 180 top
U27  PIC 18F14K50 uC  [MICROCHIP-20_SSOP]  23.06,70.8 0 bottom
U28  Spartan-3A FPGA  [XILINX-VQ100]  37.28,59.88 90 top
U29  8Mx16 SDRAM  [TSOPII-54]  36.77,73.85 270 bottom
U30  W25X20BV-SNIG/SSIG  [WINBOND-8_SOIC_150_208]  56.43,64.96 90 top
U31  +1.2V Reg.  [SOT223]  105.07,61.66 180 top
U32  +3.3V Reg.  [SOT223]  104.76,71.56 0 top
U33  PIC 18F14K50 uC  [MICROCHIP-20_SSOP]  102.98,64.2 180 bottom
U34  Spartan-3A FPGA  [XILINX-VQ100]  88.76,75.12 270 top
U35  8Mx16 SDRAM  [TSOPII-54]  89.27,61.15 90 bottom
U36  W25X20BV-SNIG/SSIG  [WINBOND-8_SOIC_150_208]  69.61,70.04 270 top
U37  +1.2V Reg.  [SOT223]  20.97,100.74 0 top
U38  +3.3V Reg.  [SOT223]  21.28,90.84 180 top
U39  PIC 18F14K50 uC  [MICROCHIP-20_SSOP]  23.06,98.2 0 bottom
U40  Spartan-3A FPGA  [XILINX-VQ100]  37.28,87.28 90 top
U41  8Mx16 SDRAM  [TSOPII-54]  36.77,101.25 270 bottom
U42  W25X20BV-SNIG/SSIG  [WINBOND-8_SOIC_150_208]  56.43,92.36 90 top
U43  +1.2V Reg.  [SOT223]  105.07,89.06 180 top
U44  +3.3V Reg.  [SOT223]  104.76,98.96 0 top
U45  PIC 18F14K50 uC  [MICROCHIP-20_SSOP]  102.98,91.6 180 bottom
U46  Spartan-3A FPGA  [XILINX-VQ100]  88.76,102.52 270 top
U47  8Mx16 SDRAM  [TSOPII-54]  89.27,88.55 90 bottom
U48  W25X20BV-SNIG/SSIG  [WINBOND-8_SOIC_150_208]  69.61,97.44 270 top
X1  MINI-USB-UX60SC-MB-5STUX60SC-MB-5ST  [UX60SC-MB-5ST]  10,12.7 0 top
X2  MINI-USB-UX60SC-MB-5STUX60SC-MB-5ST  [UX60SC-MB-5ST]  116.04,12.7 180 top
X3  MINI-USB-UX60SC-MB-5STUX60SC-MB-5ST  [UX60SC-MB-5ST]  10,40.1 0 top
X4  MINI-USB-UX60SC-MB-5STUX60SC-MB-5ST  [UX60SC-MB-5ST]  116.04,40.1 180 top
X5  MINI-USB-UX60SC-MB-5STUX60SC-MB-5ST  [UX60SC-MB-5ST]  10,67.5 0 top
X6  MINI-USB-UX60SC-MB-5STUX60SC-MB-5ST  [UX60SC-MB-5ST]  116.04,67.5 180 top
X7  MINI-USB-UX60SC-MB-5STUX60SC-MB-5ST  [UX60SC-MB-5ST]  10,94.9 0 top
X8  MINI-USB-UX60SC-MB-5STUX60SC-MB-5ST  [UX60SC-MB-5ST]  116.04,94.9 180 top

## Library data of the parts
1.2V 1.2V1-1.2V7 3.3V 3.3V1-3.3V7 5V 5V1-5V7 +3.3V +3.3V1-+3.3V7 GND GND1-GND7 = xess
C1 C4 C5 C38-C40 C73-C75 C108-C110 C143-C145 C178-C180 C213-C215 C248-C250 = rcl; DIGIKEY#: 490-3302-1-ND; MANF: Murata; MANF#: GRM188F51A475ZE20J; MOUSER#: 81-GRM188F51A475ZE20
C2 C3 C36 C37 C71 C72 C106 C107 C141 C142 C176 C177 C211 C212 C246 C247 = rcl; DIGIKEY#: 490-1403-1-ND; MANF: Murata; MANF#: GRM1885C1H100JA01D; MOUSER#: 81-GRM39C100D50
C6 C7 C9-C14 C17-C23 C41-C53 C55 C67 C76-C88 C90 C102 C111-C123 C125 C137 C146-C158 C160 C172 C181-C193 C195 C207 C216-C228 C230 C242 C251-C263 C265 C277 = rcl; DIGIKEY#: 445-1317-1-ND; MANF: TDK; MANF#: C1608X7R1C104K; MOUSER#: 810-C1608X7R1C104K
C8 C54 C89 C124 C159 C194 C229 C264 = rcl; DIGIKEY#: 445-5192-1-ND; MANF: TDK; MANF#: C1608X7R1C474K; MOUSER#: 810-C1608X7R1C474K
C15 C16 C25-C34 C57-C65 C68-C70 C92-C100 C103-C105 C127-C135 C138-C140 C162-C170 C173-C175 C197-C205 C208-C210 C232-C240 C243-C245 C267-C275 C278-C280 = rcl; DIGIKEY#: 445-3447-1-ND; MANF: TDK; MANF#: C1005Y5V1H103Z; MOUSER#: 810-C1005Y5V1H103Z
C24 C35 C56 C66 C91 C101 C126 C136 C161 C171 C196 C206 C231 C241 C266 C276 = rcl; DIGIKEY#: 490-1895-1-ND; MANF: Murata; MANF#: GRM32CF51A226ZA01L; MOUSER#: 81-GRM32CF51A226ZA01
JP1-JP24 = pinhead
LED1-LED8 = xess; DIGIKEY#: 160-1834-1-ND; MANF: Lite-On; MANF#: LTST-C194KGKT; MOUSER#: 859-LTST-C194KGKT
Q1-Q8 = xess; DIGIKEY#: 535-10283-1-ND; MANF: Abracon; MANF#: ABM8G-12.000MHZ-B4Y-T; MOUSER#: 815-ABM8G-12-B4Y-T
R1 R11 R20 R29 R38 R47 R56 R65 = rcl; MANF: Xicon; MANF#: 301-4.7K-RC; MOUSER#: 301-4.7K-RC
R2 R3 R19 R28 R37 R46 R55 R64 = rcl
R4 R12 R21 R30 R39 R48 R57 R66 = xess; DIGIKEY#: 741X163101JPCT-ND; MANF: CTS; MANF#: 741X163101JP; MOUSER#: 774-741X163101JP
R5 R13 R22 R31 R40 R49 R58 R67 = xess; DIGIKEY#: 742C083102JPCT-ND; MANF: CTS; MANF#: 742C083102JP; MOUSER#: 774-742C083102JP
R6 R16 R25 R34 R43 R52 R61 R70 = rcl; MANF: Xicon; MANF#: 301-47K-RC; MOUSER#: 301-47K-RC
R7 R14 R23 R32 R41 R50 R59 R68 = rcl; MANF: Xicon; MANF#: 301-330K-RC; MOUSER#: 301-330K-RC
R8 R15 R24 R33 R42 R51 R60 R69 = rcl; MANF: Xicon; MANF#: 301-680K-RC; MOUSER#: 301-680K-RC
R9 R17 R26 R35 R44 R53 R62 R71 = rcl; MANF: Xicon; MANF#: 301-110-RC; MOUSER#: 301-110-RC
R10 R18 R27 R36 R45 R54 R63 R72 = rcl; MANF: Xicon; MANF#: 301-102-RC; MOUSER#: 301-102-RC
U1 U10 U16 U22 U28 U34 U40 U46 = xess; DIGIKEY#: 122-1594-ND; MANF: XILINX; MANF#: XC3S200A-4VQG100C
U2 U9 U15 U21 U27 U33 U39 U45 = xess; DIGIKEY#: PIC18F14K50-I/SS-ND; MANF: Microchip; MANF#: PIC18F14K50-I/SS; MOUSER#: 579-PIC18F14K50-I/SS
U3 U11 U17 U23 U29 U35 U41 U47 = xess; DIGIKEY#: W9812G6JH-6-ND; MANF: Winbond; MANF#: W9812G6JH-6
U4 U7 U13 U19 U25 U31 U37 U43 = xess; DIGIKEY#: ZLDO1117G12DICT-ND; MANF: Diodes/Zetex; MANF#: ZLDO1117G12TA; MOUSER#: 522-ZLDO1117G12TA
U5 U12 U18 U24 U30 U36 U42 U48 = xess; DIGIKEY#: W25X20BVSNIG-ND; MANF#: W25X20BVSNIG
U6 U8 U14 U20 U26 U32 U38 U44 = xess; DIGIKEY#: ZLDO1117G33DICT-ND; MANF: Diodes/Zetex; MANF#: ZLDO1117G33TA; MOUSER#: 522-ZLDO1117G33TA
X1-X8 = xess; DIGIKEY#: H11671CT-ND; MANF: Hirose Electric Co. Ltd.; MANF#: UX60SC-MB-5ST; MOUSER#: 798-UX60SC-MB-5ST80